# Altium PCB USBDM_Kinetis.PcbDoc
Units mm, origin at the board's own origin, x right, y up, seen from the top; angles counter-clockwise.
Board outline 56.06 x 19.2 mm, 2 copper layers (Top Layer, Bottom Layer); 59 components, 56 nets, 226 pads, 106 vias.
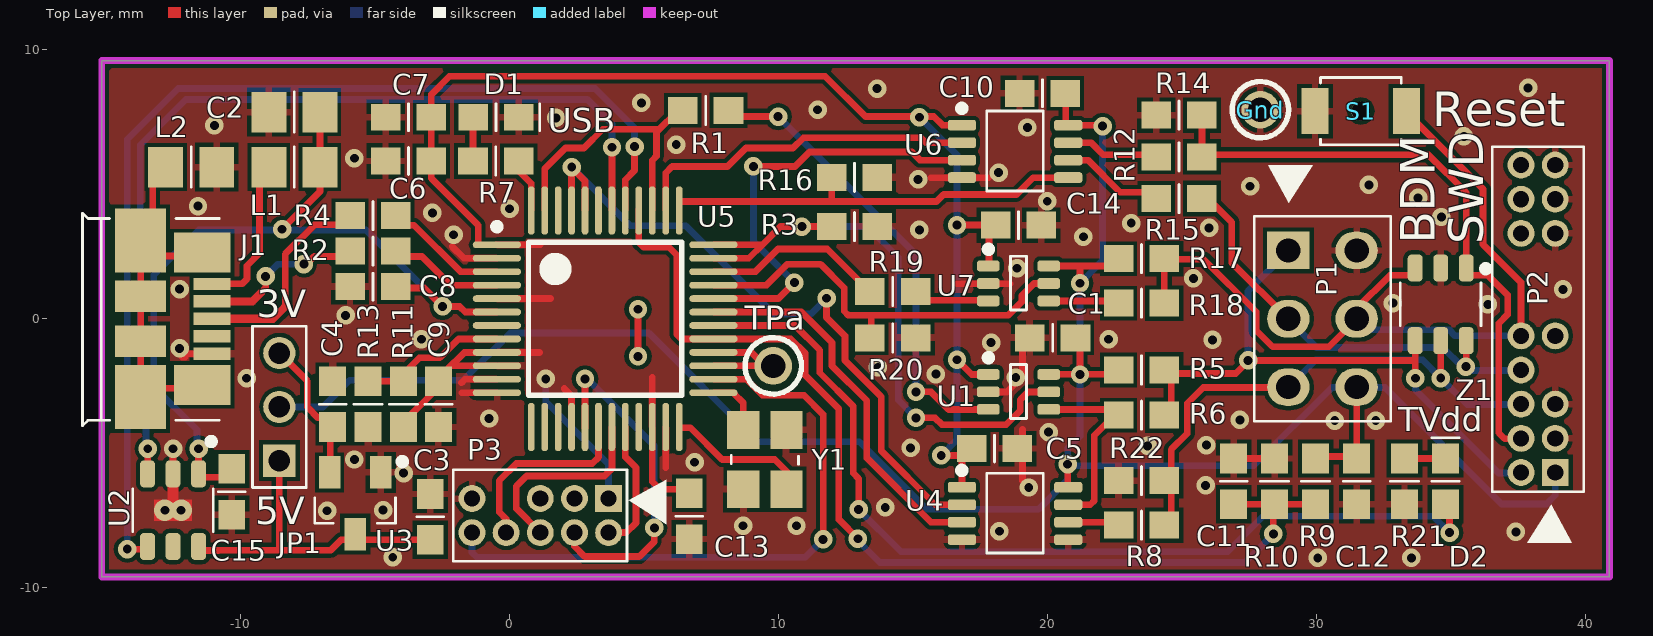
[diagram p0: Top Layer view]
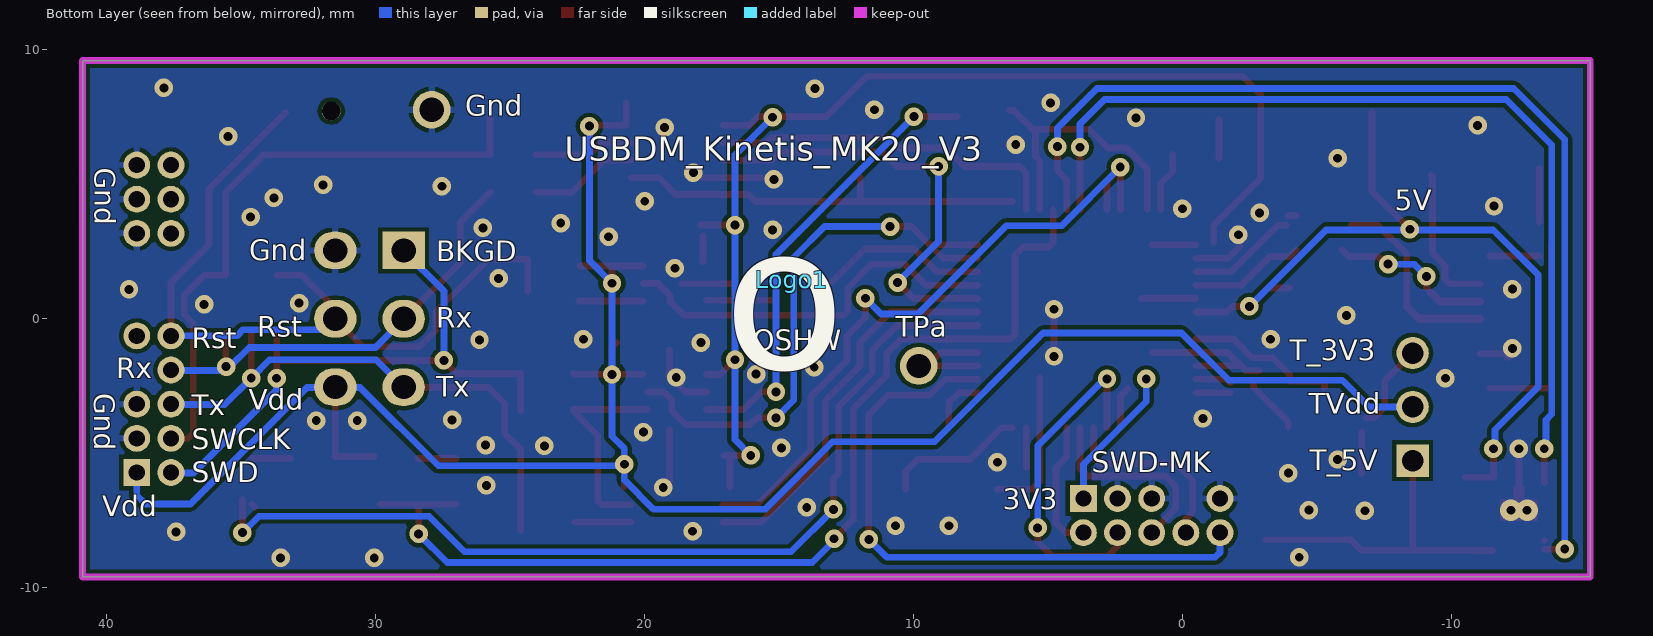
[diagram p1: Bottom Layer view, seen from below]
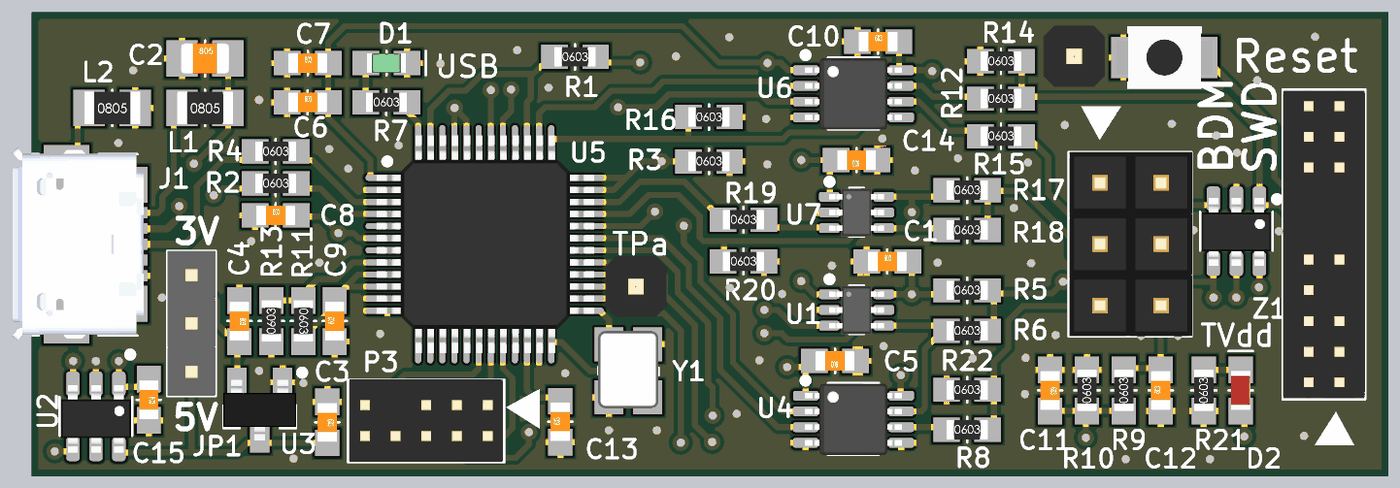
[diagram p2: 3D render of the assembled board from above, using the file's embedded part models]

## Layer stack, top to bottom
Top Solder: solder mask 0.0102, Solder Resist, Dk 3.5
Top Layer: signal copper 0.0356
Dielectric 1: dielectric 0.32, FR-4, Dk 4.8
Bottom Layer: signal copper 0.0356
Bottom Solder: solder mask 0.0102, Solder Resist, Dk 3.5

## Board outline
-15.173,-9.6 -15.173,9.6 40.885,9.6 40.885,-9.6

## Design rules (kind name [scope] priority, off if disabled: settings)
AssemblyTestPointUsage SilkToBoardRegionClearance_1 [All] p2:
AssemblyTestPointUsage SilkToBoardRegionClearance [All] p3:
Clearance [All] p1: gap=0.152
HoleSize [All] p1: absolutevalues=TRUE maxlimit=6.35 minlimit=0.33 maxpercent=80.000 minpercent=20.000
MatchedLengths DiffPair_DIFF100MatchedLengths [InDifferentialPairClass('DIFF100')] p1: tolerance=0.152 checknetsindiffpair=TRUE checkdiffpairvsdiffpair=FALSE checkothers=FALSE
MinimumAnnularRing [All] p1: minimumring=0.178
MinimumSolderMaskSliver [All] p1 off: minsoldermaskwidth=0.1
MinimumSolderMaskSliver SilkscreenOverComponentPads_2 [All] p2 off: minsoldermaskwidth=0.254
MinimumSolderMaskSliver SilkToSolderMaskClearance_1 [IsPad] p3 off: minsoldermaskwidth=0.254
MinimumSolderMaskSliver SilkscreenOverComponentPads_1 [All] p4 off: minsoldermaskwidth=0.254
MinimumSolderMaskSliver SilkToSolderMaskClearance [IsPad] p5 off: minsoldermaskwidth=0.254
MinimumSolderMaskSliver SilkscreenOverComponentPads [All] p6 off: minsoldermaskwidth=0.254
PlaneClearance [All] p1: clearance=0.254
PlaneConnect [All] p1: planeconnectstyle=Relief reliefexpansion=0.508 reliefentries=4 reliefconductorwidth=0.254 reliefairgap=0.152
PolygonConnect PolygonConnect_Via [IsVia] p1: connectstyle=Direct reliefconductorwidth=0.254 reliefentries=4 polygonreliefangle="90 Angle" airgapwidth=0.254
PolygonConnect [All] p2: connectstyle=Relief reliefconductorwidth=0.254 reliefentries=4 polygonreliefangle="90 Angle" airgapwidth=0.152
RoomDefinition USBDM_Kinetis [InComponentClass('USBDM_Kinetis')] p1: confinementstyle=ConfineIn formatcopy=TRUE lockcomponents=FALSE outline -16.519,-13.157 44.441,-13.157 44.441,12.243 -16.519,12.243
RoutingVias [All] p1: holewidth=0.305 width=0.635 viastyle="Through Hole" minholewidth=0.305 minwidth=0.635 maxholewidth=0.711 maxwidth=1.27
SilkToBoardRegionClearance SilkToBoardRegionClearance_2 [All] p1 off:
SilkToSilkClearance [All] p1 off: silktosilkclearance=0.254
SilkToSolderMaskClearance SilkToSolderMaskClearance_2 [IsPad] p1 off: minsilkscreentomaskgap=0.254 clearancetoexposedcopper=TRUE
SolderMaskExpansion [All] p1: expansion=0.102
Width [All] p1: maxlimit=2.54 minlimit=0.152 preferedwidth=0.254
23 further rules are at their usual default settings.

## Components (designator, comment, footprint, x,y, rotation, side; value= is the part's Value field where it differs from the comment)
C1 "100nF" CCNP1608-0603 20.184,-0.711 r0 top
C2 "10uF/16V" CCNP2012-0805 -8.01,7.683 r0 top
C3 "2u2F/6V" CCNP1608-0603 -2.956,-7.366 r270 top
C4 "4u7F/6V" CCNP1608-0603 -6.588,-3.175 r270 top
C5 "100nF" CCNP1608-0603 18.025,-4.826 r180 top
C6 "2u2F/6V" CCNP1608-0603 -3.768,5.867 r0 top
C7 "100nF" CCNP1608-0603 -3.764,7.493 r0 top
C8 "100nF" CCNP1608-0603 -5.089,1.194 r0 top
C9 "100nF" CCNP1608-0603 -2.651,-3.175 r90 top
C10 "100nF" CCNP1608-0603 19.803,8.382 r0 top
C11 "100nF" CCNP1608-0603 26.915,-6.045 r270 top
C12 "4u7F/6V" CCNP1608-0603 31.487,-6.045 r90 top
C13 "100nF" CCNP1608-0603 6.671,-7.341 r90 top
C14 "100nF" CCNP1608-0603 18.914,3.48 r180 top
C15 "100nF" CCNP1608-0603 -10.336,-6.433 r270 top
D1 "LED Green" LED1608-0603-GREEN -0.512,7.493 r0 top
D2 "LED Red" LED1608-0603-RED 34.789,-6.045 r90 top
Gnd "TP" "PCBPIN - 0.9mm" 27.905,7.772 r0 top
J1 "USB_MICRO_B_CONNECTOR" "MOLEX - 47346-0001" -12.404,0 r0 top
JP1 "Header 1x3 2mm" "HEADER 1X3 (2MM)" -8.569,-3.277 r180 top
L1 "FB" CR2012-0805 -8.01,5.639 r0 top
L2 "FB" CR2012-0805 -11.846,5.639 r0 top
Logo1 "OSHW Logo" OSHW 14.52,1.448 r180 bottom
P1 "BDM2X3" BDM 28.947,2.54 r270 top
P2 "SWD-2x10" "SWD-2X10 - REDUCED" 38.869,-5.715 r90 top
P3 "SWD2X5" SWD-2X5 3.674,-6.68 r180 top
R1 "1K" CR1608-0603 7.281,7.747 r0 top
R2 "33R" CR1608-0603 -5.089,2.515 r0 top
R3 "10K" CR1608-0603 12.818,3.429 r0 top
R4 "33R" CR1608-0603 -5.089,3.835 r0 top
R5 "100K" CR1608-0603 23.486,-1.905 r0 top
R6 "47R" CR1608-0603 23.486,-3.581 r0 top
R7 "470R" CR1608-0603 -0.517,5.867 r0 top
R8 "47R" CR1608-0603 23.486,-7.671 r0 top
R9 "10K" CR1608-0603 29.963,-6.045 r90 top
R10 "10K" CR1608-0603 28.439,-6.045 r90 top
R11 "100K" CR1608-0603 -3.946,-3.175 r270 top
R12 "47R" CR1608-0603 24.883,6.02 r0 top
R13 "0R" CR1608-0603 -5.267,-3.175 r90 top
R14 "100K" CR1608-0603 24.883,7.569 r0 top
R15 "47R" CR1608-0603 24.883,4.47 r0 top
R16 "10K" CR1608-0603 12.818,5.258 r0 top
R17 "100K" CR1608-0603 23.486,2.235 r0 top
R18 "47R" CR1608-0603 23.486,0.584 r0 top
R19 "1K" CR1608-0603 14.24,1.016 r0 top
R20 "10K" CR1608-0603 14.24,-0.711 r0 top
R21 "470R" CR1608-0603 33.265,-6.045 r90 top
R22 "100K" CR1608-0603 23.486,-6.02 r0 top
S1 "SW-PB-SMT-B3U-1000P-B" SW_SMT_PB2-B3U-1000P-B 31.639,7.722 r0 top
TPa "TP" "PCBPIN - 0.9mm" 9.795,-1.753 r0 top
U1 "SN74LVC1T45DCKT" SC70_N 18.914,-2.718 r0 top
U2 "MIC2005-0.5YM6-TR" SOT23-6-POWER -12.52,-7.118 r180 top
U3 "MCP1703T-3302E/CB" SOT23 -5.75,-6.858 r180 top
U4 "SN74LVC2T45DCTR" SSOP8_N 18.787,-7.239 r0 top
U5 "MK20DX128VLF5/MK22DX128VLF5" TSQFP50P900X900-48L 3.547,0 r0 top
U6 "SN74LVC2T45DCTR" SSOP8_N 18.787,6.223 r0 top
U7 "SN74LVC1T45DCKT" SC70_N 18.914,1.314 r0 top
Y1 "XTAL_SMT2_FA-238" "CRYSTAL_SMT - EPSON-FA-238" 9.484,-5.236 r90 top
Z1 "82402305" SOT23-6 34.611,0.539 r180 top

## Footprints (in the part's own frame and the unit in brackets; to place one, negate y for a bottom-side part, rotate by r counter-clockwise, add the part's x,y. Pads: shape width x height; smd on the part's side, far side on the other; paste and mask are expansions set on the pad)
BDM [mil] "HCS12 style BDM connector"
  rect 55x62 hole 35.43: 1(0,0)
  oval 55x62 hole 35.43: 2(0,100) 3(100,0) 4(100,100) 5(200,0) 6(200,100)
  silkscreen extent -124,-50 250,150, body extent -50,-49 250,151, height 333
CCNP1608-0603 [mm]
  rect 1.1x1 smd: 1(-0.85,0) 2(0.85,0)
  silkscreen extent 0,-0.5 0,0.5, body extent -0.8,-0.4 0.8,0.4, height 0.3
CCNP2012-0805 [mm]
  rect 1.3x1.5 smd: 1(-0.95,0) 2(0.95,0)
  silkscreen extent 0,-0.75 0,0.75, body extent -1,-0.62 1,0.63, height 0.78
CR1608-0603 [mm]
  rect 1.1x1 smd: 1(-0.85,0) 2(0.85,0)
  silkscreen extent 0,-0.53 0,0.53, body extent -0.85,-0.4 0.85,0.4, height 0.56
CR2012-0805 [mm]
  rect 1.3x1.5 smd: 1(-0.95,0) 2(0.95,0)
  silkscreen extent 0,-0.75 0,0.75, body extent -1.15,-0.67 1.15,0.68, height 0.76
"CRYSTAL_SMT - EPSON-FA-238" [mm] "Crystal SMT low profile 3.2 x 2.5"
  rect 1.4x1.2 smd: 1(-1.1,-0.8) 2(1.1,-0.8) 3(1.1,0.8) 4(-1.1,0.8)
  silkscreen extent -0.17,-1.25 0.15,1.25, body extent -1.55,-1.24 1.65,1.26, height 0.7
"HEADER 1X3 (2MM)" [mm]
  rect 1.2x1.2 hole 0.8: 1(0,2)
  round 1.2 hole 0.8: 2(0,0) 3(0,-2)
  silkscreen extent -1,-3 1,3, body extent -1,-3 1,3, height 5
LED1608-0603-GREEN [mm] "SMT-LED 0603"
  rect 1.1x1 smd: A(-0.85,0) K(0.85,0)
  silkscreen extent 0,-0.5 1.62,0.5, body extent -0.8,-0.4 0.8,0.4, height 0.75
LED1608-0603-RED [mm] "SMT-LED 0603"
  rect 1.1x1 smd: A(-0.85,0) K(0.85,0)
  silkscreen extent 0,-0.5 1.62,0.5, body extent -0.8,-0.4 0.8,0.4, height 0.75
"MOLEX - 47346-0001" [mm] "RECEPTACLE, MICRO USB B, BOTTOM MOUNT"
  rect 1.38x0.45 smd: D+(1.33,0) D-(1.33,0.65) G(1.33,-1.3) ID(1.33,-0.65) Vbus(1.33,1.3)
  rect 1.9x2.38 smd: S1(-1.33,2.91) S4(-1.33,-2.91)
  rect 1.9x1.18 smd: S2(-1.33,0.838) S3(-1.33,-0.838)
  rect 2.1x1.48 smd: S5(0.97,2.46) S6(0.97,-2.46)
  silkscreen extent -3.48,-3.98 1.6,3.93, body extent -3.58,-3.99 1.85,3.99, height 2.72
OSHW [mm] "OSHW Logo"
"PCBPIN - 0.9mm" [mm]
  round 1.4 hole 0.9: 1(0,0)
  silkscreen extent -1.05,-1.05 1.05,1.05, body extent -1.27,-1.27 1.27,1.27, height 6
SC70_N [mm] "SC70, 6-Leads, Body 2.15x1.4mm, Pitch 0.65mm, IPC Medium Density"
  rrect50% 0.85x0.4 smd: 1(-1.125,0.65) 2(-1.125,0) 3(-1.125,-0.65) 4(1.125,-0.65) 5(1.125,0) 6(1.125,0.65)
  silkscreen extent -1.24,-0.99 0.3,1.39, body extent -1.14,-1 1.14,1, height 1.1
SOT23 [mm] "SOT-23; 3 Leads; Body 3.0 x 2.3 mm, inc. leads (LxW max)"
  rect 0.8x1.2 smd: 1(-0.95,-1.15) 2(0.95,-1.15) 3(0,1.15)
  silkscreen extent -1.88,-1.67 1.5,0.75, body extent -1.5,-1.25 1.5,1.25, height 1.05
SOT23-6 [mm] "SOT-23; 6 Leads; Body 3.0 x 2.3 mm, inc. leads (LxW max)"
  rrect50% 0.55x1 smd: 1(-0.95,-1.35) 2(0,-1.35) 3(0.95,-1.35) 4(0.95,1.35) 5(0,1.35) 6(-0.95,1.35)
  silkscreen extent -1.8,-1.45 1.5,0.8, body extent -1.45,-1.37 1.45,1.43, height 1.45
SOT23-6-POWER [mm]
  rrect50% 0.55x1 smd: 1(-0.95,-1.35) 2(0,-1.35) 3(0.95,-1.35) 4(0.95,1.35) 5(0,1.35) 6(-0.95,1.35)
  Top Layer region: 0.7,-0.4 0.7,0.4 -0.7,0.4 -0.7,-0.4
  Top Layer region: -0.2,-0.9 0.2,-0.9 0.2,0.1 -0.2,0.1
  silkscreen extent -1.54,-2.68 1.5,0.8, body extent -1.45,-1.3 1.45,1.5, height 1.45
SSOP8_N [mm] "SSOP, 8-Leads, Body 2.9x3.2mm, Pitch 0.65mm, IPC Medium Density"
  rrect50% 1.05x0.4 smd: 1(-1.975,0.975) 2(-1.975,0.325) 3(-1.975,-0.325) 4(-1.975,-0.975) 5(1.975,-0.975) 6(1.975,-0.325) 7(1.975,0.325) 8(1.975,0.975)
  silkscreen extent -2.11,-1.47 1.05,1.73, body extent -2.01,-1.47 2.01,1.48, height 1.3
SW_SMT_PB2-B3U-1000P-B [mm] "Miniature SMT Push Button with Boss"
  round 0.7 hole 0.7 unplated: 0(0,0)
  rect 1x1.7 smd: 1(-1.7,0) 2(1.7,0)
  silkscreen extent -1.5,-1.25 1.5,1.25, body extent -2,-1.25 2,1.25, height 1.6
SWD-2X5 [mm] "Connector; SWD; 2x5 Position"
  rect 1x1 hole 0.6: 1(0,0)
  round 1 hole 0.6: 2(0,1.27) 3(1.27,0) 4(1.27,1.27) 5(2.54,0) 6(2.54,1.27) 8(3.81,1.27) 9(5.08,0) 10(5.08,1.27)
  silkscreen extent -2.15,-1.06 5.77,2.33, body extent -0.63,-1.09 5.72,2.31, height 4.5
"SWD-2X10 - REDUCED" [mm] "Connector; SWD; 2x10 Position"
  rect 1x1 hole 0.6: 1(0,0)
  round 1 hole 0.6: 2(0,1.27) 3(1.27,0) 4(1.27,1.27) 5(2.54,0) 6(2.54,1.27) 8(3.81,1.27) 9(5.08,0) 10(5.08,1.27) 15(8.89,0) 16(8.89,1.27) 17(10.16,0) 18(10.16,1.27) 19(11.43,0) 20(11.43,1.27)
  silkscreen extent -2.6,-1.07 12.12,2.34, body extent -0.64,-1.06 12.06,2.34, height 4.5
TSQFP50P900X900-48L [mm] "Thin QFP, 48-Leads, Body 7x7mm, Pitch 0.5mm, IPC High Density"
  oval 1.8x0.25 smd: 1(-4.025,2.75) 2(-4.025,2.25) 3(-4.025,1.75) 4(-4.025,1.25) 5(-4.025,0.75) 6(-4.025,0.25) 7(-4.025,-0.25) 8(-4.025,-0.75) 9(-4.025,-1.25) 10(-4.025,-1.75) 11(-4.025,-2.25) 12(-4.025,-2.75) 25(4.025,-2.75) 26(4.025,-2.25) 27(4.025,-1.75) 28(4.025,-1.25) 29(4.025,-0.75) 30(4.025,-0.25) 31(4.025,0.25) 32(4.025,0.75) 33(4.025,1.25) 34(4.025,1.75) 35(4.025,2.25) 36(4.025,2.75)
  oval 0.25x1.8 smd: 13(-2.75,-4.025) 14(-2.25,-4.025) 15(-1.75,-4.025) 16(-1.25,-4.025) 17(-0.75,-4.025) 18(-0.25,-4.025) 19(0.25,-4.025) 20(0.75,-4.025) 21(1.25,-4.025) 22(1.75,-4.025) 23(2.25,-4.025) 24(2.75,-4.025) 37(2.75,4.025) 38(2.25,4.025) 39(1.75,4.025) 40(1.25,4.025) 41(0.75,4.025) 42(0.25,4.025) 43(-0.25,4.025) 44(-0.75,4.025) 45(-1.25,4.025) 46(-1.75,4.025) 47(-2.25,4.025) 48(-2.75,4.025)
  silkscreen extent -4.15,-2.85 2.85,3.55, body extent -4.47,-4.5 4.53,4.5, height 1.6

## Part data
C1 C5 C7 C8 C9 C10 C11 C13 C14: library part Cap, "Capacitor"
C2: library part Cap_CCNP_0805, "Capacitor SMT 0805"
C3 C4 C6 C12: library part Cap_CCNP_0603, "Capacitor SMT 0603"
C15: library part Cap, "Capacitor SMT"
D1: library part LED-0603-Green, "LED 0603 Green"
D2: library part LED-0603-Red, "LED 0603 Red"
Gnd TPa: "Test Point"
J1: "USB Micro-B Connector"
JP1: "Header, 1x3, 2mm"
L1 L2: library part "Ferrite Bead 0805", "Ferrite Bead (0805) 0.045OHM, 2A"
P2: library part SWD2X10-Reduced, "SWD Connector 2x10-Pin"
P3: "SWD Connector 2x5-Pin"
R1 R3 R5 R6 R7 R8 R9 R10 R12 R14 R15 R16 R17 R18 R19 R20 R21 R22: library part Res, "Resistor SMT"
R2 R4: library part Res, "Resistor"
R11 R13: library part Res_CR0603, "Resistor"
S1: "Switch OMRON B3U series"
U1 U4 U6 U7: "Dual voltage bidirection buffer"
U2: "Power Switch"
U3: "3V3 LDO regulator"
U5: library part MK20DX128VLF5, "Arm Cortex M4"
Y1: "Crystal (EPSON  Q22FA23800065 FA-238 24 MHZ 12.0PF)"
Z1: "Quintuple Unipolar Protection Device (5V)"

## Via types
v1: diameter 0.686, hole 0.33, Top Layer to Bottom Layer, tented both sides, 103 vias
v2: diameter 0.8, hole 0.33, Top Layer to Bottom Layer, tented both sides, 2 vias
v3: diameter 0.686, hole 0.33, Top Layer to Bottom Layer, tented top, 1 vias

## Nets (pads, with @x,y where several pads share a name; then routed paths per layer and width w, separated by ;. In a path a pad name is that pad's centre, name@x,y a point inside that pad or via, vN(x,y) a via of type N, cw(c..) or ccw(c..) an arc to the next point about the centre after c; other vN are vias at no path point)
3V3: C5.2 C6.2 C7.2 C9.2 C13.2 C14.2 P3.1 R11.2 U1.1 U4.1 U5.1 U5.5 U5.9 U5.10 U5.16 U5.22 U6.1 U7.1 | length 70.7
  Top Layer w0.25: R11.2 -3.946,-3.843 -2.651,-2.547 C9.2 ; C9.2@-2.854,-1.93 -2.371,-1.93 -1.691,-1.25 -0.503,-1.25 1.108,-1.25 ; -2.194,-1.75 U5.10@-0.503,-1.75 ; U5.1@-1.178,2.854 -1.178,3.48 -2.918,5.221 -2.918,8.343 -2.244,9.017 11.725,9.017 13.224,7.518 15.762,7.518 16.082,7.198 U6.1@17.087,7.198 ; U5.5@-0.503,0.75 1.515,0.75 ; U5.1@-0.503,2.75 1.127,2.75 ; 2.023,-2.591 2.297,-2.865 U5.16@2.297,-4.05 ; 5.297,-2.187 5.297,-4.05 5.297,-6.049 5.586,-6.338 C13.2@6.866,-6.338 ; v1(16.044,-5.08) C5.2@17.048,-5.08 ; v1(16.628,-1.524) 17.177,-2.073 U1.1@17.687,-2.073 ; v1@16.628,3.484 C14.2@17.9,3.484 ; U4.1 C5.2@16.812,-5.119 ; U7.1@17.814,2.118 C14.2@17.814,3.073
  Bottom Layer w0.25: v1(1.337,-2.235) 1.337,-3.073 3.674,-5.41 P3.1 ; v1(15.231,7.493) 16.628,6.096 v1(16.628,-1.524) 16.628,-4.496 v1(16.044,-5.08)
  other v1: 16.628,3.48
5V: C2.2 C8.2 C15.1 L1.2 U2.1 U5.6 | length 30.6
  Top Layer w0.25: U2.1@-11.57,-5.895 C15.1@-10.522,-5.895 ; U2.1@-11.57,-5.819 v1@-11.57,-4.756 ; v3(-8.467,3.327) -7.06,4.735 C2.2 ; C8.2@-3.985,1.143 -3.184,1.143 v1(-2.498,0.457) -1.863,0.457 -1.656,0.25 U5.6@-0.503,0.25
  Bottom Layer w0.25: v1@-11.632,-4.826 -11.632,-4.125 -13.243,-2.515 -13.243,1.626 -11.566,3.302 -5.343,3.302 v1(-2.498,0.457)
  other v1: -11.57,-4.832
ADC0_DP0: U5.7
BKGD/SWD_DIR: R3.1 U1.5 U5.35 U5.36 | length 22.6
  Top Layer w0.25: U5.35@7.597,2.25 8.886,2.25 9.386,2.75 ; U5.36@7.597,2.75 9.386,2.75 ; R3.1 10.065,3.429 9.386,2.75 ; v1(15.104,-3.683) 15.815,-3.683 16.069,-3.937 18.457,-3.937 18.981,-3.413 18.981,-3.007 19.265,-2.723 U1.5@19.887,-2.723
  Bottom Layer w0.25: v1(10.862,3.429) 13.3,3.429 14.443,2.286 14.443,-3.023 v1(15.104,-3.683)
BKGD/SWD_I: U4.2 U5.44 U5.45 | length 25.9
  Top Layer w0.25: U5.45@2.297,4.05 2.297,5.619 2.797,5.119 U5.44@2.797,4.05 ; v1(11.776,0.762) 11.776,0.051 12.462,-0.635 12.462,-1.549 13.808,-2.896 13.808,-4.902 15.82,-6.914 U4.2@17.087,-6.914
  Bottom Layer w0.25: v1(2.302,5.639) 4.487,3.454 6.544,3.454 9.821,0.178 11.192,0.178 v1(11.776,0.762)
BKGD/SWD_O: R1.1 U5.39 U5.47 | length 10.7
  Top Layer w0.25: U5.47@1.297,4.05 1.297,5.573 2.074,6.35 2.759,6.35 3.455,7.046 5.561,7.046 ; U5.39@5.297,4.05 5.297,5.89 5.452,6.045 5.452,6.937 6.262,7.747 R1.1
DBG_RX: U4.3 U5.31 | length 14.5
  Top Layer w0.25: U5.31@7.597,0.25 10.841,0.25 11.98,-0.889 11.98,-1.753 13.275,-3.048 13.275,-5.182 15.657,-7.564 U4.3@17.087,-7.564
DBG_TX: U5.32 U6.3 | length 16.6
  Top Layer w0.25: U5.32@7.597,0.75 9.986,0.75 v1(10.583,1.346) ; v1(9.059,5.664) 10.608,5.664 11.141,6.198 14.951,6.198 15.251,5.898 U6.3 U6.3@17.087,5.898
  Bottom Layer w0.25: v1(9.059,5.664) 9.059,2.87 v1(10.583,1.346)
EXTAL: U5.25 Y1.3 | length 2.1
  Top Layer w0.25: U5.25@7.597,-2.75 8.303,-2.75 8.684,-3.131 Y1.3@8.684,-3.981
EXTAL32: U5.15
GND: C1.1 C2.1 C3.1 C4.1 C5.1 C6.1 C7.1 C8.1 C9.1 C10.1 C11.1 C12.1 C13.1 C14.1 C15.2 D1.K Gnd.1 J1.G L2.2 P1.2 P2.3 P2.5 P2.15 P2.17 P2.19 P3.3 P3.5 P3.9 R3.2 R10.2 R13.1 R14.1 R16.2 R20.2 R21.1 R22.1 S1.1 U1.2 U2.2 U3.1 U4.4 U4.5 U5.2 U5.11 U5.12 U5.23 U6.4 U7.2 Y1.2 Y1.4 Z1.2 | length 20.6
  Top Layer w0.25: -12.52,-6.61 U2.2 v1(-12.52,-4.832) ; -12.171,-1.427 -12.075,-1.427 ; v1@-12.075,-1.3 J1.G ; -2.143,2.692 -1.7,2.25 U5.2@-0.503,2.25 ; -1.803,-2.383 -1.67,-2.25 U5.11@-0.503,-2.25 ; -1.787,-2.75 U5.12@-0.503,-2.75 ; v1(4.766,-1.397) v1(4.766,0.356) ; 5.797,-5.537 U5.23@5.797,-4.05 ; 15.653,5.248 17.796,5.248 ; 16.628,1.297 18.604,1.297 ; U1.2@17.687,-2.723 18.477,-2.723 19.059,-2.141 19.059,-1.875 ; 19.06,-1.874 C1.1@19.06,-1.163 ; v1@19.066,-6.02 19.066,-4.115 ; C11.1@26.991,-5.195 R10.2@28.413,-5.195
  other v1: 30.039,-8.89 33.519,-8.89 -4.353,-8.865 37.405,-7.925 18.203,-7.899 8.678,-7.696 10.659,-7.696 -6.791,-7.137 -4.708,-7.112 13.961,-7.01 19.295,-6.274 25.873,-6.198 -3.946,-5.74 6.874,-5.334 -5.775,-5.232 14.901,-4.801 23.714,-4.724 25.899,-4.699 20.031,-4.216 30.674,-3.785 32.198,-3.785 27.143,-3.759 -0.771,-3.708 -9.788,-2.21 18.812,-2.184 15.84,-2.057 13.681,-1.803 -12.275,-1.1 17.898,-0.889 26.127,-0.787 -3.286,-0.762 22.267,-0.762 -6.105,0.127 36.364,0.533 32.833,0.584 -12.275,1.1 39.158,1.092 25.416,1.499 18.863,1.88 21.327,3.048 -2.092,3.124 15.231,3.302 26,3.378 23.105,3.556 34.636,3.785 -2.879,3.937 -0.009,4.089 -11.592,4.191 19.981,4.369 33.773,4.496 27.524,4.928 31.944,4.978 15.18,5.182 18.177,5.436 -5.775,5.969 6.188,6.477 35.475,6.782 19.244,7.112 -10.982,7.188 1.718,7.468 11.446,7.772 4.893,8.026 13.656,8.56 37.862,8.585
  other v2: -12.82,-7.118 -12.22,-7.118
ID: R11.1 R13.2 U5.8 | length 5.8
  Top Layer w0.25: R13.2@-5.292,-2.565 -5.292,-2.325 -3.997,-2.325 -3.997,-2.083 -3.362,-1.448 -2.6,-1.448 -1.902,-0.75 U5.8@-0.503,-0.75
LED: D2.A U5.30 | length 35.6
  Top Layer w0.25: U5.30@7.597,-0.25 10.604,-0.25 11.522,-1.168 11.522,-2.007 12.772,-3.256 12.772,-5.745 12.97,-5.944 v1(12.97,-7.087) ; D2.A@34.484,-6.997 D2.A@34.586,-6.895 ; v1(34.941,-7.95) D2.A@34.941,-6.731
  Bottom Layer w0.25: v1(12.97,-7.087) 14.545,-8.661 26.686,-8.661 28.007,-7.341 34.332,-7.341 v1(34.941,-7.95)
NetD1_A: D1.A R7.1 | length 1.4
  Top Layer w0.25: R7.1@-1.367,5.969 D1.A@-1.367,7.417
NetD2_K: D2.K R21.2 | length 1.4
  Top Layer w0.25: R21.2@33.163,-5.195 D2.K@34.586,-5.195
NetJ1_D+: J1.D+ R4.1 | length 7.4
  Top Layer w0.25: -8.351,0.449 -8.351,2.403 -7.261,3.492 R4.1@-6.282,3.492
  Top Layer w0.3: J1.D+ -8.799,0 -8.351,0.449
NetJ1_D-: J1.D- R2.1 | length 6.2
  Top Layer w0.25: -9.26,0.96 -9.077,1.143 v1(-9.077,1.575) ; v1(-7.655,2.032) -7.553,2.032 -7.274,2.311 -6.193,2.311 R2.1@-5.939,2.565
  Top Layer w0.3: J1.D- -9.57,0.65 -9.26,0.96
  Bottom Layer w0.25: v1(-9.077,1.575) -8.62,2.032 v1(-7.655,2.032)
NetJ1_VBUS: J1.Vbus L1.1 | length 5.4
  Top Layer w0.25: J1.Vbus -9.958,1.3 -9.772,1.485 -9.772,1.972 -9.306,2.438 L1.1@-9.306,5.305 ; L1.1@-9.255,5.305 L1.1@-9.255,5.356
NetR1_2: R1.2 U1.3 | length 16.8
  Top Layer w0.25: R1.2@8.359,7.518 v1(9.973,7.518) ; v1(15.104,-2.718) 15.663,-2.718 16.318,-3.373 U1.3@17.687,-3.373
  Bottom Layer w0.25: v1(9.973,7.518) 15.104,2.388 v1(15.104,-2.718)
NetR6_1: R6.1 U1.4 U4.7 | length 7.8
  Top Layer w0.25: U1.4@19.887,-3.373 R6.1@22.636,-3.373 ; U4.7@20.487,-6.914 21.581,-6.914 21.733,-6.762 21.733,-4.332 R6.1@22.636,-3.429
NetR8_1: R8.1 U4.6 | length 2.1
  Top Layer w0.25: U4.6@20.487,-7.564 R8.1@22.58,-7.564
NetR12_1: R12.1 U6.7 | length 3.7
  Top Layer w0.25: U6.7@20.487,6.548 21.611,6.548 22.063,6.096 R12.1@24.033,6.096
NetR15_1: R15.1 U6.6 | length 4
  Top Layer w0.25: U6.6@20.487,5.898 21.499,5.898 22.698,4.699 R15.1@24.033,4.699
NetR18_1: R18.1 U7.4 | length 2.4
  Top Layer w0.25: U7.4 R18.1@22.436,0.664
NetR19_2: R19.2 U7.3 | length 2.6
  Top Layer w0.25: R19.2@15.104,0.691 U7.3@17.687,0.691
PTA4: U5.21
PTD2: U5.43
PTD5: U5.46
RESETB: P3.10 U5.26 | length 23.4
  Top Layer w0.25: U5.26@7.597,-2.25 8.794,-2.25 9.389,-2.845 10.938,-2.845 11.649,-3.556 v1(11.649,-8.204)
  Bottom Layer w0.25: P3.10 -1.406,-8.687 -1.228,-8.865 10.989,-8.865 v1(11.649,-8.204)
RST_DIR: R20.1 U5.33 U7.5 | length 15.4
  Top Layer w0.25: U5.33@7.597,1.25 9.547,1.25 10.329,2.032 11.548,2.032 12.437,1.143 12.437,0.279 12.589,0.127 18.53,0.127 19.041,0.638 19.041,0.864 19.491,1.314 U7.5 ; R20.1@13.441,-0.635 13.441,0.088
RST_IO: R19.1 U5.34 | length 7.1
  Top Layer w0.25: U5.34@7.597,1.75 9.132,1.75 9.973,2.591 11.802,2.591 13.48,0.913 R19.1@13.48,0.691
SWCLK_O: U5.38 U6.2 | length 13.3
  Top Layer w0.25: U5.38@5.797,4.05 5.797,5.425 6.036,5.664 8.093,5.664 8.779,6.35 10.532,6.35 10.913,6.731 15.282,6.731 15.465,6.548 U6.2 U6.2@17.087,6.548
SWD_CLK: P3.4 U5.17 | length 12.9
  Top Layer w0.25: P3.4 2.404,-8.458 2.785,-8.839 4.817,-8.839 5.376,-8.28 v1(5.376,-7.772) ; U5.17@2.797,-4.05 v1(2.797,-2.235)
  Bottom Layer w0.25: v1@2.759,-2.108 5.376,-4.724 v1(5.376,-7.772)
SWD_DIO: P3.2 U5.20 | length 4.9
  Top Layer w0.25: P3.2 4.331,-7.95 4.69,-7.591 4.69,-5.537 4.297,-5.144 U5.20@4.297,-4.05
SWD_EN: R16.1 U5.37 U6.5 | length 15.4
  Top Layer w0.25: U5.37@6.315,4.357 15.866,4.357 16.132,4.623 18.838,4.623 19.463,5.248 U6.5@20.487,5.248 ; 11.968,4.37 R16.1
SWD_RX: P3.8 U5.18 | length 7.2
  Top Layer w0.25: P3.8 -0.136,-7.442 -0.39,-7.188 -0.39,-6.02 0.245,-5.385 3.064,-5.385 3.297,-5.152 U5.18@3.297,-4.05
SWD_TX: P3.6 U5.19 | length 7.4
  Top Layer w0.25: P3.6 0.245,-7.061 0.245,-6.223 0.626,-5.842 3.521,-5.842 3.797,-5.567 U5.19@3.797,-4.05
T_BKGD/SWD: P1.1 P2.2 R5.2 R6.2 Z1.4 | length 22.6
  Top Layer w0.25: R6.2@24.59,-3.429 24.59,-2.032 26.991,-2.032 27.468,-1.555 33.597,-1.555 33.62,-1.578 ; v1@33.661,-2.21 Z1.4@33.661,-0.536
  Bottom Layer w0.25: v1(27.448,-1.549) 27.448,1.025 P1.1@28.947,2.524 ; v1(33.671,-2.21) 33.671,-2.642 36.761,-5.731 P2.2@37.599,-5.731
T_DBG_RX: P1.3 P2.8 R15.2 Z1.6 | length 16.5
  Top Layer w0.25: R15.2@25.733,4.699 26.839,3.593 26.839,2.092 P1.3@28.947,-0.016 ; v1@35.561,-1.671 Z1.6@35.561,-0.536
  Bottom Layer w0.25: P1.3@28.947,-0.016 29.998,-1.067 34.687,-1.067 35.398,-1.778 v1(35.551,-1.778) ; v1@35.681,-1.801 35.801,-1.921 37.583,-1.921 P2.8
T_DBG_TX: P1.5 P2.6 R8.2 R22.2 Z1.5 | length 20.4
  Top Layer w0.25: R8.2@24.59,-7.874 24.59,-4.865 25.188,-4.267 25.188,-3.149 25.781,-2.556 P1.5@28.947,-2.556 ; v1(34.611,-2.204) Z1.5@34.611,-0.536
  Bottom Layer w0.25: P1.5@28.947,-2.556 29.979,-1.524 33.931,-1.524 v1(34.611,-2.204) 35.598,-3.191 P2.6@37.599,-3.191
T_RST: P1.4 P2.10 R17.2 R18.2 S1.2 Z1.3 | length 30.1
  Top Layer w0.25: R18.2@24.332,1.016 24.332,2.21 25.803,2.21 27.753,0.26 27.753,-0.432 28.363,-1.041 30.461,-1.041 31.487,-0.016 31.487,0.381 32.72,1.614 Z1.3@33.661,1.614 ; S1.2@33.339,7.673 36.186,4.826 36.186,2.769 37.599,1.356 P2.10 P2.10@37.599,-0.651
  Bottom Layer w0.25: P1.4@31.487,-0.016 31.877,-0.406 34.916,-0.406 35.144,-0.635 P2.10@37.583,-0.635 ; P2.10@37.599,-0.651 P2.10@37.583,-0.635 ; P2.10 P2.10@37.583,-0.635
T_SWCLK: P2.4 R12.2 R14.2 Z1.1 | length 22.9
  Top Layer w0.25: R14.2@25.733,7.493 25.733,6.096 34.154,6.096 35.561,4.689 35.561,1.614 36.375,1.614 37.1,0.889 37.1,0.152 36.77,-0.178 36.77,-4.242 36.989,-4.461 P2.4@37.599,-4.461
TPA: TPa.1 U5.27 U5.28 | length 4
  Top Layer w0.25: U5.27@7.597,-1.75 9.488,-1.75 8.988,-1.25 U5.28@7.597,-1.25
USB_DM: R2.2 U5.4 | length 4.3
  Top Layer w0.25: R2.2@-4.239,2.565 -3.985,2.311 -3.26,2.311 -2.199,1.25 U5.4@-0.503,1.25
USB_DP: R4.2 U5.3 | length 4.4
  Top Layer w0.25: R4.2 R4.2@-3.926,3.835 ; R4.2@-3.884,3.48 -3.57,3.48 -1.84,1.75 U5.3@-0.503,1.75
USB_LED: R7.2 U5.48 | length 2.2
  Top Layer w0.25: R7.2@0.352,6.115 0.352,5.481 0.797,5.036 U5.48@0.797,4.05
USB_SH: J1.S1 J1.S2 J1.S3 J1.S4 J1.S5 J1.S6 L2.1 | length 11.3
  Top Layer w0.25: J1.S4@-13.725,-2.587 J1.S1@-13.725,2.767 ; J1.S4@-13.544,-2.587 J1.S6@-11.434,-2.587 ; J1.S1@-13.284,2.333 J1.S5@-11.434,2.333 ; J1.S1@-13.278,3.595 L2.1@-13.278,5.588
VBDM: C11.2 R9.1 R10.1 U5.29 U5.40 | length 38.8
  Top Layer w0.25: U5.40@4.797,4.05 4.797,2.839 4.969,2.667 5.909,2.667 6.214,2.362 6.214,-0.584 6.38,-0.75 10.444,-0.75 10.989,-1.295 10.989,-2.113 12.234,-3.358 12.234,-7.468 v1(12.945,-8.179) ; C11.2@26.991,-6.895 R9.1@29.836,-6.895 ; v1(28.388,-8.001) R10.1@28.388,-6.921
  Bottom Layer w0.25: v1(12.945,-8.179) 12.945,-8.253 13.755,-9.064 27.325,-9.064 v1(28.388,-8.001)
VDD_BDM: C1.2 C10.2 C12.2 JP1.2 P1.6 P2.1 R5.1 R9.2 R17.1 U1.6 U4.8 U6.8 U7.6 | length 83.5
  Top Layer w0.25: U1.6 v1@21.2,-2.068 ; U7.6 R17.1@22.389,1.964 ; C10.2@20.674,8.023 20.674,7.198 22.175,7.198 22.14,7.163 v1(22.038,7.163) ; U4.8@20.743,-6.245 v1(20.743,-5.41) ; C1.2@21.034,-0.889 21.2,-1.055 v1@21.2,-2.068 ; v1(21.2,-2.073) v1@21.2,-2.068 ; v1(21.2,1.321) 21.2,1.854 ; R5.1@22.636,-2.032 22.6,-2.068 v1@21.2,-2.068 ; R9.2@30.037,-5.121 31.487,-5.121 P1.6@31.487,-2.556
  Bottom Layer w0.25: JP1.2 -6.944,-3.277 -5.953,-2.286 -1.736,-2.286 0.019,-0.53 5.169,-0.53 9.211,-4.572 12.996,-4.572 15.51,-7.087 19.65,-7.087 20.743,-5.994 v1(20.743,-5.41) ; v1@21.2,1.295 v1(21.2,-2.073) 21.2,-4.369 20.743,-4.826 v1(20.743,-5.41) ; v1(21.2,1.321) 22.038,2.159 v1(22.038,7.163) ; P2.1@38.869,-5.731 38.869,-6.563 38.548,-6.883 36.872,-6.883 32.544,-2.556 30.566,-2.556 27.661,-5.461 20.793,-5.461 v1(20.743,-5.41)
VDD_EN: U2.3 U5.42 | length 34.5
  Top Layer w0.25: U2.3@-13.47,-6.094 -13.46,-6.084 v1@-13.46,-4.756 ; v1@3.75,6.375 v1(3.801,6.375) ; U5.42@3.797,4.05 v1@3.797,6.329
  Bottom Layer w0.25: v1@-13.522,-4.826 -13.522,-3.759 -13.741,-3.54 -13.741,6.461 -12.049,8.153 2.886,8.153 3.801,7.239 v1(3.801,6.375)
  other v1: -13.46,-4.832
VDD_FLT: U2.4 U5.41 | length 39.5
  Top Layer w0.25: v1(-14.222,-8.566) U2.4@-13.47,-8.566 ; U2.4@-13.479,-8.236 U2.4@-13.47,-8.244 ; U5.41@4.297,4.05 4.297,5.17 4.639,5.512 v1(4.639,6.401)
  Bottom Layer w0.25: v1@-14.284,-8.636 v1@-14.284,-8.566 ; v1(-14.222,-8.566) -14.222,6.666 -12.328,8.56 3.166,8.56 4.639,7.087 v1(4.639,6.401)
VREFO: U5.13
VRIN: C3.2 JP1.1 U2.6 U3.3 | length 11.9
  Top Layer w0.25: U2.6@-11.549,-8.617 -10.844,-8.617 ; -10.906,-8.611 -6.659,-8.611 -6.26,-8.211 -4.734,-8.211 C3.2@-3.103,-8.211 ; -8.569,-8.458 JP1.1
VROUT: C4.2 JP1.3 U3.2 | length 4.9
  Top Layer w0.25: JP1.3 -7.528,-2.318 -7.528,-3.283 -7.128,-3.683 C4.2@-6.828,-3.683 ; U3.2@-6.674,-5.759 C4.2@-6.674,-4.206
XTAL: U5.24 Y1.1 | length 5.3
  Top Layer w0.25: U5.24@6.297,-4.05 6.708,-4.05 7.894,-5.236 9.85,-5.236 10.284,-5.67 Y1.1
XTAL32: U5.14
pads on no net: J1.ID P2.9 P2.16 P2.18 P2.20 S1.0 U2.5

## Polygon pours and split planes (outlines as drawn)
GND on Top Layer "Top Layer-No Net" (solid, remove dead copper, pour order 8): -15.224,-9.56 -15.224,9.44 40.885,9.44 40.885,-9.56
3V3 on Top Layer "Top Layer-No Net" (solid, pour order 6): 0.551,2.972 6.468,2.972 6.468,-2.925 0.551,-2.925
GND on Bottom Layer "Top Layer-No Net" (solid, remove dead copper, pour order 7): -15.158,9.429 40.874,9.429 40.874,-9.571 -15.158,-9.571

## Keep-outs
Keep-Out Layer:
  the board outline again, w0.25

## Silkscreen, mask and mechanical layers (free items; w line width, h text height)
Top Overlay:
  text "Reset" at 34.306,7.163 h1.27
  text "USB" at 1.413,6.934 h0.89
  text "BDM" at 34.382,2.794 h1.27 r90
  text "SWD" at 36.186,2.769 h1.27 r90
  text "3V" at -9.407,0.051 h1.02
  text "TVdd" at 33.036,-4.191 h0.89
  text "5V" at -9.458,-7.645 h1.02
Bottom Overlay:
  text "Gnd" at 26.661,7.544 h0.76
  text "USBDM_Kinetis_MK20_V3" at 22.952,5.867 h0.89
  text "Gnd" at 40.428,5.613 h0.76 r90
  text "5V" at -7.909,4.039 h0.76
  text "Gnd" at 34.687,2.184 h0.76
  text "BKGD" at 27.728,2.134 h0.76
  text "Rx" at 27.728,-0.33 h0.76
  text "TPa" at 10.659,-0.66 h0.76
  text "Rst" at 34.382,-0.66 h0.76
  text "Rst" at 36.821,-1.092 h0.76
  text "T_3V3" at -3.997,-1.549 h0.76
  text "Rx" at 39.64,-2.21 h0.76
  text "Gnd" at 40.453,-2.769 h0.76 r90
  text "Tx" at 27.728,-2.896 h0.76
  text "Vdd" at 34.713,-3.378 h0.76
  text "TVdd" at -4.708,-3.531 h0.76
  text "Tx" at 36.821,-3.581 h0.76
  text "SWCLK" at 36.821,-4.851 h0.76
  text "T_5V" at -4.734,-5.639 h0.76
  text "SWD-MK" at 3.369,-5.715 h0.76
  text "SWD" at 36.821,-6.071 h0.76
  text "3V3" at 6.671,-7.087 h0.76
  text "Vdd" at 40.148,-7.341 h0.76
Mechanical 13:
  lines w0.25: -12.76,-9.5 -12.76,-7.239 ; -5.851,-10.516 -5.851,-6.833

## Text inside footprints (layer, text, board x,y; h text height)
Logo1: Bottom Overlay "OSHW" at 15.967,-1.168 h0.76; Bottom Overlay "o" at 12.513,-3.785 h10.16